# EAGLE board 1.4Fv4 (EAGLE 9.3.0)
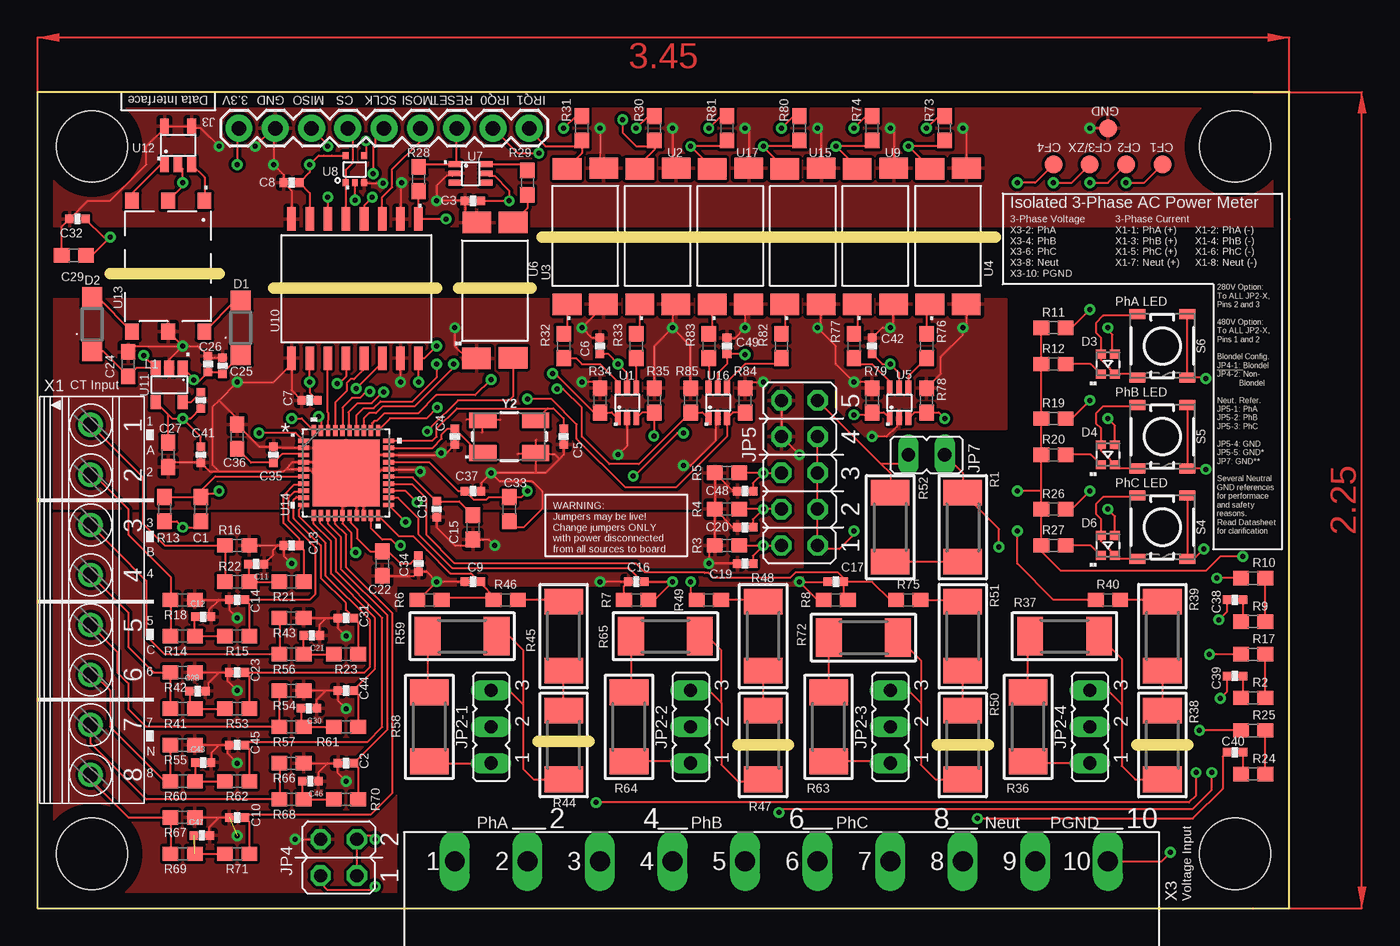
[diagram p0: board, top side]
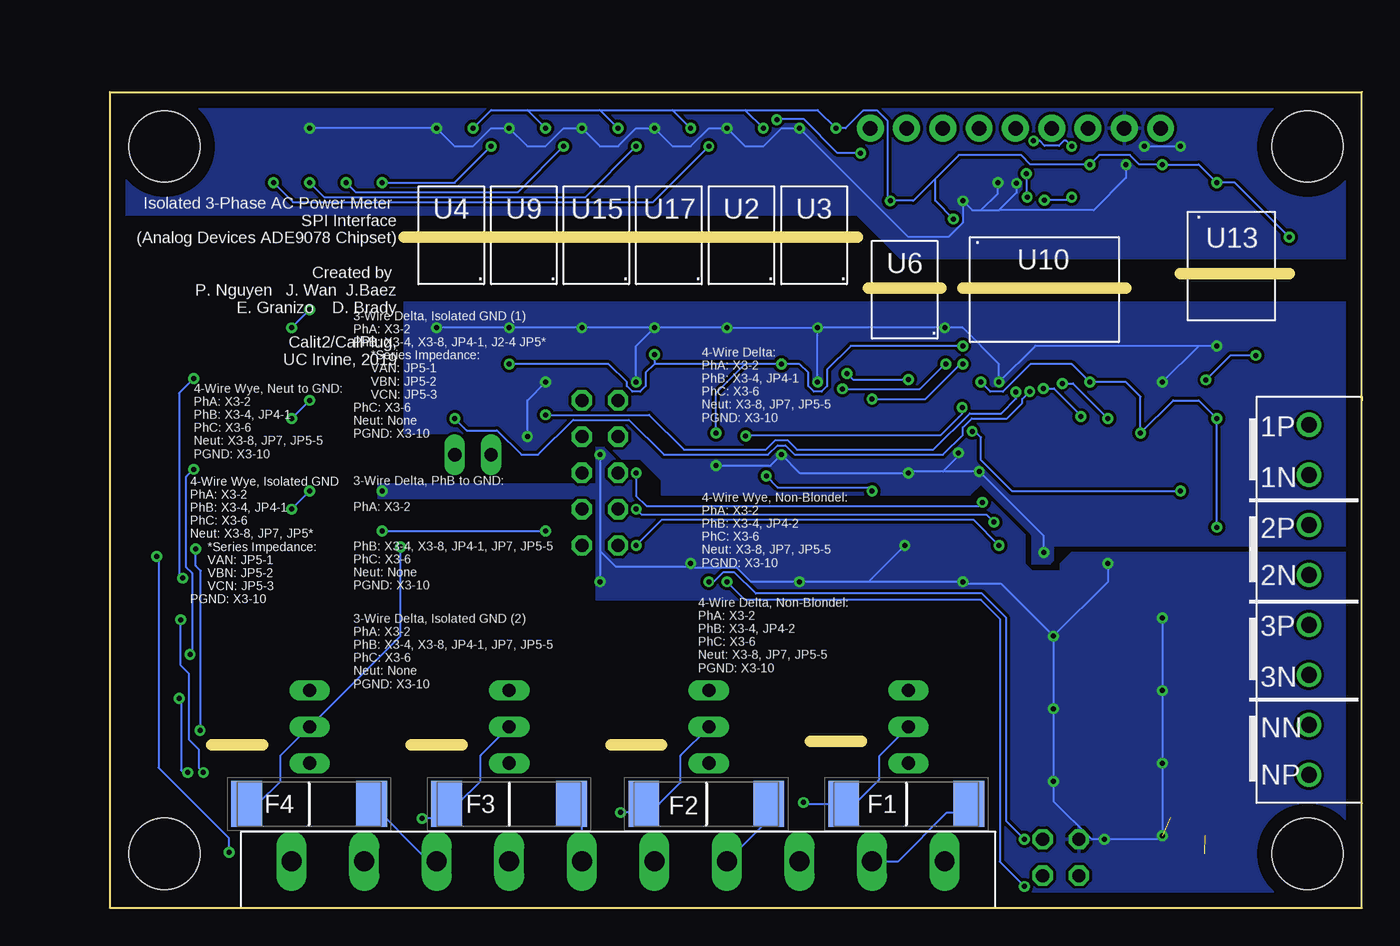
[diagram p1: board, bottom side, seen from below]

Size 87.63 x 57.15 mm. Coordinates in mm from the lower left corner, seen from the top.
Outline: 0,0 0,57.15 87.63,57.15 87.63,0 0,0
Copper layers (1*16): Top 0.035mm / dielectric 1.5mm / Bottom 0.035mm
Design rules "1.1F": minimum track width 6mil, minimum drill 0.35mm, track to track 0.205mm, track to pad 0.205mm, pad to pad 0.205mm, via to via 0.205mm, smd to smd 6mil, copper to edge 40mil, drill to drill 6mil, minimum pad ring 10mil, minimum via ring 8mil, stop-mask expansion 4mil, vias tented up to drill 0mil, thermal gap 10mil
Net classes: 0 default: clearance 0.205 mm
Holes 4.98 mm at 83.82,3.81 83.82,53.34 3.81,53.34 3.81,3.81
Milling: 8 lines

## Footprints (pad centres in the part's own frame; a part is rotated, then mirrored left to right if it is on the bottom)
0603 = smd 1.1 x 1: 1 -0.85,0; 2 0.85,0
0402-CAP = smd 0.6 x 0.6: 1 -0.55,0; 2 0.55,0
C0603 = smd 1.1 x 1: 1 -0.85,0; 2 0.85,0
SOD123 = smd 1.4 x 1.4: A 1.9,0; C -1.9,0
WL-SBCW_0606 = smd 0.6 x 0.7: 1 -0.7,0.5; 2 0.7,0.5; 3 -0.7,-0.5; 4 0.7,-0.5
FUSC10131X312N = smd 2.16 x 3.23: 1 -4.375,0; 2 4.375,0
1X09 = drill 1.016 pad 1.88: 1 0,0; 2 2.54,0; 3 5.08,0; 4 7.62,0; 5 10.16,0; 6 12.7,0; 7 15.24,0; 8 17.78,0; 9 20.32,0
JP2 = drill 0.914 long: 1 -2.54,0; 2 0,0; 3 2.54,0
JP2Q = drill 0.914 octagon: 1 -1.27,-1.27; 2 -1.27,1.27; 3 1.27,-1.27; 4 1.27,1.27
JP5Q = drill 0.914 octagon: 1 -5.08,-1.27; 2 -5.08,1.27; 3 -2.54,-1.27; 4 -2.54,1.27; 5 0,-1.27; 6 0,1.27; 7 2.54,-1.27; 8 2.54,1.27; 9 5.08,-1.27; 10 5.08,1.27
JP1 = drill 0.914 long: 1 0,-1.27; 2 0,1.27
0402-RES = smd 0.6 x 0.6: 1 -0.55,0; 2 0.55,0
R2010 = smd 1.8 x 2.7: 1 -2.413,0; 2 2.413,0
TACTILE_SWITCH_SMD_4.5MM = smd 0.7 x 1.1: 1 2.225,1.75; 2 2.225,-1.75; 3 -2.225,-1.75; 4 -2.225,1.75
B1,27 = smd 1.27 x 1.27: TP 0,0
DCKT = smd 0.9 x 0.4: 1 0,1.3; 2 0,0.65; 3 0,0; 4 2.2,0; 5 2.2,0.65; 6 2.2,1.3
PS2505 = smd 1.5 x 2: 1 0.381,3.575; 2 0.381,1.035; 3 9.906,1.016; 4 9.854,3.575
NL17SZ125 = smd 0.5 x 0.4: 1 0,1.3; 2 0,0.65; 3 0,0; 4 1.9,0; 5 1.9,1.3
16-SOIC = smd 1.65 x 0.6: 1 0,8.89; 2 0,7.62; 3 0,6.35; 4 0,5.08; 5 0,3.81; 6 0,2.54; 7 0,1.27; 8 0,0; 9 9.75,0; 10 9.75,1.27; 11 9.75,2.54; 12 9.75,3.81; 13 9.75,5.08; 14 9.75,6.35; 15 9.75,7.62; 16 9.75,8.89
TSOT25 = smd 0.7 x 1: 1 0,0; 2 0.95,0; 3 1.9,0; 4 1.9,2.4; 5 0,2.4
SOT-23-5 = smd 0.6 x 1.05: 1 0,0; 2 0.95,0; 3 1.9,0; 4 1.9,2.7; 5 0,2.7
TRANSFO_3.3 = smd 1.12 x 0.96: 1 0,5.08; 2 0,2.54; 3 0,0; 4 9.14,0; 5 9.14,2.54; 6 9.14,5.08
CP_40_7 = smd 0.762 x 0.305: 1 -2.972,2.25; 2 -2.972,1.75; 3 -2.972,1.25; 4 -2.972,0.75; 5 -2.972,0.25; 6 -2.972,-0.25; 7 -2.972,-0.75; 8 -2.972,-1.25; 9 -2.972,-1.75; 10 -2.972,-2.25; 21 2.972,-2.25; 22 2.972,-1.75; 23 2.972,-1.25; 24 2.972,-0.75; 25 2.972,-0.25; 26 2.972,0.25; 27 2.972,0.75; 28 2.972,1.25; 29 2.972,1.75; 30 2.972,2.25 | smd 0.305 x 0.762: 11 -2.25,-2.972; 12 -1.75,-2.972; 13 -1.25,-2.972; 14 -0.75,-2.972; 15 -0.25,-2.972; 16 0.25,-2.972; 17 0.75,-2.972; 18 1.25,-2.972; 19 1.75,-2.972; 20 2.25,-2.972; 31 2.25,2.972; 32 1.75,2.972; 33 1.25,2.972; 34 0.75,2.972; 35 0.25,2.972; 36 -0.25,2.972; 37 -0.75,2.972; 38 -1.25,2.972; 39 -1.75,2.972; 40 -2.25,2.972 | smd 4.699 x 4.699: 41 0,0
1751303 = drill 1.1 pad 1.7: 1 -12.25,-0.1; 2 -8.75,-0.1; 3 -5.25,-0.1; 4 -1.75,-0.1; 5 1.75,-0.1; 6 5.25,-0.1; 7 8.75,-0.1; 8 12.25,-0.1
MSTBA10 = drill 1.397 long: 1 -22.86,5.08; 2 -17.78,5.08; 3 -12.7,5.08; 4 -7.62,5.08; 5 -2.54,5.08; 6 2.54,5.08; 7 7.62,5.08; 8 12.7,5.08; 9 17.78,5.08; 10 22.86,5.08
CRYSTAL-SMD-5X3.2-4PAD = smd 1.9 x 1.1: 1 -1.85,-1.15; 2 1.85,-1.15; 3 1.85,1.15; 4 -1.85,1.15

## Placement (x,y rotation side)
C1  1uF  [0603]  11.43,27.94 90 top
C2  22n  [0402-CAP]  21.59,10.16 0 top
C3  0.1u  [0402-CAP]  30.48,49.53 180 top
C4  30p  [0402-CAP]  29.21,33.02 90 top
C5  30p  [0402-CAP]  36.83,33.02 270 top
C6  0.1u  [0402-CAP]  39.37,39.37 270 top
C7  0.1u  [0402-CAP]  19.05,35.56 0 top
C8  0.1u  [0402-CAP]  17.78,50.8 180 top
C9  22n  [0402-CAP]  30.48,22.86 180 top
C10  22n  [0402-CAP]  13.97,6.35 180 top
C11  22n  [0402-CAP]  15.3,24.1 180 top
C12  22n  [0402-CAP]  11.6,20.4 0 top
C13  22n  [0402-CAP]  17.78,25.4 0 top
C14  22n  [0402-CAP]  13.97,21.59 180 top
C15  4.7uF  [C0603]  30.48,26.67 270 top
C16  22n  [0402-CAP]  41.91,22.86 180 top
C17  22n  [0402-CAP]  55.88,22.86 180 top
C18  0.22u  [0402-CAP]  27.94,27.94 90 top
C19  22n  [0402-CAP]  49.53,24.13 180 top
C20  22n  [0402-CAP]  49.53,26.67 180 top
C21  22n  [0402-CAP]  19.2,19.1 180 top
C22  4.7uF  [C0603]  24.13,24.13 270 top
C23  22n  [0402-CAP]  13.97,16.51 180 top
C24  10uF  [C0603]  6.35,38.1 90 top
C25  1u  [0402-CAP]  12.95,37.97 270 top
C26  0.1u  [0402-CAP]  11.94,38.1 270 top
C27  10uF  [C0603]  9.14,31.75 270 top
C28  22n  [0402-CAP]  11.2,15.2 0 top
C29  10uF TANT  [C0603]  2.54,45.72 180 top
C30  22n  [0402-CAP]  19,14 180 top
C31  22n  [0402-CAP]  21.59,20.32 0 top
C32  0.1u  [0402-CAP]  2.79,48.26 0 top
C33  10uF  [C0603]  33.02,27.94 270 top
C34  0.1uF  [0402-CAP]  26.67,24.13 90 top
C35  0.22u  [0402-CAP]  16.51,31.75 270 top
C36  4.7uF  [C0603]  13.97,33.02 90 top
C37  0.1u  [0402-CAP]  30.48,29.21 180 top
C38  50n  [0402-CAP]  83.82,21.59 0 top
C39  50n  [0402-CAP]  83.82,16.26 0 top
C40  50n  [0402-CAP]  83.82,10.92 0 top
C41  0.1u  [0402-CAP]  11.43,31.75 270 top
C42  0.1u  [0402-CAP]  58.42,39.37 270 top
C43  22n  [0402-CAP]  11.6,10.2 0 top
C44  22n  [0402-CAP]  21.59,15.24 0 top
C45  22n  [0402-CAP]  13.97,11.43 180 top
C46  22n  [0402-CAP]  19.1,8.9 180 top
C47  22n  [0402-CAP]  11.5,5.1 0 top
C48  22n  [0402-CAP]  49.53,29.21 180 top
C49  0.1u  [0402-CAP]  48.26,39.37 270 top
D1  MBR0520LT  [SOD123]  14.22,40.64 90 top
D2  MBR0520LT  [SOD123]  3.81,40.89 90 top
D3  [WL-SBCW_0606]  74.93,38.1 90 top
D4  [WL-SBCW_0606]  74.93,31.75 90 top
D6  [WL-SBCW_0606]  74.93,25.4 90 top
F1  0461.500ER  [FUSC10131X312N]  31.9,7.3 0 bottom
F2  0461.500ER  [FUSC10131X312N]  45.9,7.3 0 bottom
F3  0461.500ER  [FUSC10131X312N]  59.7,7.3 0 bottom
F4  0461.500ER  [FUSC10131X312N]  73.7,7.3 0 bottom
J3  [1X09]  14.1,54.61 0 top
JP2-1  [JP2]  31.75,12.7 90 top
JP2-2  [JP2]  45.72,12.7 90 top
JP2-3  [JP2]  59.69,12.7 90 top
JP2-4  [JP2]  73.66,12.7 90 top
JP4  [JP2Q]  21.08,3.56 90 top
JP5  [JP5Q]  53.34,30.48 90 top
JP7  [JP1]  62.23,31.75 90 top
L1  15nH  [0402-RES]  11.43,35.56 270 top
R1  300k  [R2010]  64.77,26.67 270 top
R2  5k  [0603]  85.09,14.73 0 top
R3  1k  [0603]  48.26,25.4 0 top
R4  1k  [0603]  48.26,27.94 0 top
R5  1k  [0603]  48.26,30.48 0 top
R6  1k  [0603]  27.43,21.59 0 top
R7  1k  [0603]  41.91,21.59 0 top
R8  1k  [0603]  55.88,21.59 0 top
R9  5k  [0603]  85.09,20.07 0 top
R10  5k  [0603]  85.09,23.11 180 top
R11  2k  [0603]  71.12,40.64 0 top
R12  2k  [0603]  71.12,38.1 180 top
R13  4.7k  [0603]  8.89,27.94 270 top
R14  0  [0603]  10.16,19.05 0 top
R15  1k  [0603]  13.97,19.05 0 top
R16  20  [0603]  13.97,25.4 180 top
R17  5k  [0603]  85.09,17.78 180 top
R18  20  [0603]  10.16,21.59 0 top
R19  2k  [0603]  71.12,34.29 0 top
R20  2k  [0603]  71.12,31.75 180 top
R21  1k  [0603]  17.78,22.86 0 top
R22  0  [0603]  13.97,22.86 0 top
R23  1k  [0603]  21.59,17.78 0 top
R24  5k  [0603]  85.09,9.4 0 top
R25  5k  [0603]  85.09,12.45 180 top
R26  2k  [0603]  71.12,27.94 0 top
R27  2k  [0603]  71.12,25.4 0 top
R28  4.7k  [0603]  26.67,51.05 90 top
R29  560  [0603]  34.29,50.8 270 top
R30  4.7k  [0603]  43.18,54.61 90 top
R31  4.7k  [0603]  38.1,54.61 90 top
R32  560  [0603]  36.83,39.37 270 top
R33  560  [0603]  41.91,39.37 270 top
R34  10k  [0603]  39.37,35.56 270 top
R35  10k  [0603]  43.18,35.56 90 top
R36  245k  [R2010]  69.34,12.7 90 top
R37  245k  [R2010]  71.89,19.05 0 top
R38  120k  [R2010]  78.74,11.43 90 top
R39  120k  [R2010]  78.74,19.05 90 top
R40  120k  [0603]  74.93,21.59 180 top
R41  0  [0603]  10.16,13.97 0 top
R42  20  [0603]  10.16,16.51 0 top
R43  20  [0603]  17.78,20.32 180 top
R44  120k  [R2010]  36.83,11.43 90 top
R45  120k  [R2010]  36.83,19.05 90 top
R46  120k  [0603]  32.77,21.59 180 top
R47  120k  [R2010]  50.8,11.43 90 top
R48  120k  [R2010]  50.8,19.05 90 top
R49  120k  [0603]  46.99,21.59 180 top
R50  120k  [R2010]  64.77,11.43 90 top
R51  120k  [R2010]  64.77,19.05 90 top
R52  300k  [R2010]  59.69,26.67 90 top
R53  1k  [0603]  13.97,13.97 0 top
R54  20  [0603]  17.78,15.24 180 top
R55  20  [0603]  10.16,11.43 180 top
R56  0  [0603]  17.78,17.78 0 top
R57  0  [0603]  17.78,12.7 0 top
R58  245k  [R2010]  27.43,12.7 90 top
R59  245k  [R2010]  29.72,19.05 0 top
R60  0  [0603]  10.16,8.89 0 top
R61  1k  [0603]  21.59,12.7 0 top
R62  1k  [0603]  13.97,8.89 0 top
R63  245k  [R2010]  55.37,12.7 90 top
R64  245k  [R2010]  41.4,12.7 90 top
R65  245k  [R2010]  43.95,19.05 0 top
R66  20  [0603]  17.78,10.16 180 top
R67  20  [0603]  10.16,6.35 0 top
R68  0  [0603]  17.78,7.62 0 top
R69  0  [0603]  10.16,3.81 0 top
R70  1k  [0603]  21.59,7.62 0 top
R71  1k  [0603]  13.97,3.81 0 top
R72  245k  [R2010]  57.82,18.95 0 top
R73  4.7k  [0603]  63.5,54.61 90 top
R74  4.7k  [0603]  58.42,54.61 90 top
R75  120k  [0603]  60.96,21.59 180 top
R76  560  [0603]  62.23,39.37 270 top
R77  560  [0603]  57.15,39.37 270 top
R78  10k  [0603]  62.23,35.56 90 top
R79  10k  [0603]  58.42,35.56 270 top
R80  4.7k  [0603]  53.34,54.61 90 top
R81  4.7k  [0603]  48.26,54.61 270 top
R82  560  [0603]  52.07,39.37 270 top
R83  560  [0603]  46.99,39.37 270 top
R84  10k  [0603]  49.53,35.56 90 top
R85  10k  [0603]  45.72,35.56 270 top
S4  MOMENTARY-SWITCH-SPST-SMD-4.5MM  [TACTILE_SWITCH_SMD_4.5MM]  78.74,26.67 270 top
S5  MOMENTARY-SWITCH-SPST-SMD-4.5MM  [TACTILE_SWITCH_SMD_4.5MM]  78.74,33.02 270 top
S6  MOMENTARY-SWITCH-SPST-SMD-4.5MM  [TACTILE_SWITCH_SMD_4.5MM]  78.74,39.37 270 top
TP1  PTR1B1,27  [B1,27]  71.12,52.07 180 top
TP2  PTR1B1,27  [B1,27]  73.66,52.07 0 top
TP3  PTR1B1,27  [B1,27]  76.2,52.07 180 top
TP4  PTR1B1,27  [B1,27]  78.74,52.07 180 top
TP5  PTR1B1,27  [B1,27]  74.93,54.61 180 top
U1  SN74LVC  [DCKT]  41.91,34.29 90 top
U2  PS2505  [PS2505]  45.72,41.91 90 top
U3  PS2505  [PS2505]  40.64,41.91 90 top
U4  PS2505  [PS2505]  66.04,41.91 90 top
U5  SN74LVC  [DCKT]  60.96,34.29 90 top
U6  PS2505  [PS2505]  29.71,48.4 270 top
U7  SN74LVC  [DCKT]  29.21,50.8 0 top
U8  NL17SZ125  [NL17SZ125]  22.86,50.8 90 top
U9  PS2505  [PS2505]  60.96,41.91 90 top
U10  ISO7241  [16-SOIC]  17.78,48.26 270 top
U11  PAM2305  [TSOT25]  10.16,37.85 180 top
U12  SN6501  [SOT-23-5]  8.89,52.07 0 top
U13  TRANSFO_3.3  [TRANSFO_3.3]  6.6,49.53 270 top
U14  ADE9078  [CP_40_7]  21.59,30.48 0 top
U15  PS2505  [PS2505]  55.88,41.91 90 top
U16  SN74LVC  [DCKT]  48.26,34.29 90 top
U17  PS2505  [PS2505]  50.8,41.91 90 top
X1  1751303  [1751303]  3.81,21.59 270 top
X3  MSTBA10  [MSTBA10]  52.07,-1.78 0 top
Y2  12.288MHz  [CRYSTAL-SMD-5X3.2-4PAD]  33.02,33.02 0 top

## Library data of the parts
C1 = SparkFun-Capacitors; MPN: MC0805B104K500A5.08MM; OC_NEWARK: 46P6240; PROD_ID: CAP-00867
C2 C9-C14 C16 C17 C19-C21 C23 C28 C30 C31 C38-C40 C43-C48 = Nizanlib; MF: KEMET; MPN: C0603C223K5RACTU; OC_NEWARK: 03C3260
C3 C6-C8 C25 C26 C32 C34 C37 C41 C42 C49 = Nizanlib; MPN: C0603X5R1A104K030BC; OC_NEWARK: 04X3188
C4 C5 = Nizanlib; MPN: MC0402N180J500CT; OC_NEWARK: 06R4796
C15 C22 C24 C27 C33 C36 = resistor; MPN: C1608X5R1A106K080AC; OC_NEWARK: 04X3243
C18 C35 = Nizanlib; MPN: MC0805F224Z500CT; OC_NEWARK: 06R3958
C29 = resistor; MF: VISHAY/SPRAGUE; MPN: 195D106X96R3V2T; OC_NEWARK: 08J0446
D1 D2 = diode; MPN: MBR0520LT1G.; OC_NEWARK: 26AC1776
D3 D4 D6 = Wurth_Elektronik_Optoelectronics_rev18a
F1-F4 = SamacSys_Parts; DESCRIPTION: Littelfuse 0.5A Non-Resettable Surface Mount Fuse, 600 V; HEIGHT: 3.12mm; MANUFACTURER_NAME: LITTELFUSE; MANUFACTURER_PART_NUMBER: 0461.500ER; MOUSER_PART_NUMBER: 576-0461.500ER
J3 = SparkFun-Connectors; MF: TYCO ELECTRONICS; MPN: 350547-1; OC_NEWARK: 01C1197
JP2-1-JP2-4 JP7 = jumper
JP4 JP5 = jumper; MF: TYCO ELECTRONICS; MPN: 350547-1; OC_NEWARK: 01C1197
L1 = Nizanlib; OC_NEWARK: unknown
R1 R36-R39 R44 R45 R47 R48 R50-R52 R58 R59 R63-R65 R72 = rc-master-smd
R2-R35 R40-R43 R46 R49 R53-R57 R60-R62 R66-R71 R73-R85 = SparkFun-Resistors
S4-S6 = SparkFun-Switches; PROD_ID: SWCH-09213
TP1-TP5 = testpad
U1 U5 U16 = Damien_divers; MF: TEXAS INSTRUMENTS; MPN: SN74LVC1G34DBVR; OC_NEWARK: 01J0787
U2-U4 U6 U9 U15 U17 = wattmeter; MPN: PS2505-4-A; OC_NEWARK: 09X6256
U7 = Damien_divers; MF: TEXAS INSTRUMENTS; MPN: SN74LVC1G34DBVR; OC_NEWARK: 01J0787; SPICEPREFIX: X
U8 = wattmeter; MPN: SN74LVC1G125DRLR; OC_NEWARK: 01X3093
U10 = wattmeter; MPN: ISO7241CQDWRQ1; OC_NEWARK: 58Y3495
U11 = Damien_regulator; OC_NEWARK: unknown
U12 = CalPlug; MPN: SN6501DBVT; OC_NEWARK: 05W5796
U13 = Damien_power; OC_NEWARK: unknown
U14 = 9078v1; MPN: ADE9078ACPZ; OC_NEWARK: 15AC8059
X1 = con-phoenix-350; OC_FARNELL: unknown; OC_NEWARK: unknown
X3 = con-phoenix-508; MF: FARNELL; MPN: 1757323; OC_FARNELL: 3705249; OC_NEWARK: 71C4168
Y2 = SparkFun-Clocks; PROD_ID: XTAL-09653; SPICEPREFIX: B

## Nets
AGND: C2.1 C9.2 C10.2 C11.1 C12.2 C13.1 C14.2 C15.2 C16.2 C17.2 C18.1 C19.2 C20.2 C21.1 C22.2 C23.2 C28.2 C30.1 C31.1 C34.1 C43.2 C44.1 C45.2 C46.1 C47.2 C48.2 JP4.4 JP5.8 JP5.10 R3.1 R4.1 R5.1 R6.1 R7.1 R8.1 R16.1 R18.2 R42.2 R43.1 R54.1 R55.1 R66.1 R67.2
AVDDOUT: C15.1 C18.2 U14.25
CF1_ISO: R85.2 U14.33 U16.1
CF1_OUT: R81.2 TP4.TP U17.4
CF2_ISO: R84.1 U14.34 U16.3
CF2_OUT: R80.1 TP3.TP U15.4
CF3/ZX_ISO: R79.2 U5.1 U14.35
CF3/ZX_OUT: R74.1 TP2.TP U9.4
CF4_ISO: R78.1 U5.3 U14.36
CF4_OUT: R73.1 TP1.TP U4.4
CS: J3.4 U8.1 U10.5
CS_ISO: U10.12 U14.40
DVDDOUT: C35.2 C36.1 U14.3
GND: C3.2 C8.2 C29.2 C32.1 J3.2 TP5.TP U2.3 U3.3 U4.3 U6.2 U7.2 U8.3 U9.3 U10.2 U10.8 U12.4 U12.5 U15.3 U17.3
GNDI: C4.1 C5.2 C6.1 C7.1 C24.2 C25.1 C26.1 C27.2 C33.2 C35.1 C36.2 C37.1 C41.2 C42.1 C49.1 R34.1 R35.2 R78.2 R79.1 R84.2 R85.1 U1.2 U2.2 U3.2 U4.2 U5.2 U6.3 U9.2 U10.9 U10.15 U11.2 U13.5 U14.2 U14.4 U14.5 U14.15 U14.17 U14.18 U14.26 U14.28 U14.41 U15.2 U16.2 U17.2
I1N: R14.1 R18.1 X1.2
I1P: R16.2 R22.1 X1.1
I2N: R41.1 R42.1 X1.4
I2P: R43.2 R56.1 X1.3
I3N: R55.2 R60.1 X1.6
I3P: R54.2 R57.1 X1.5
I_NEUT_N: R67.1 R69.1 X1.8
I_NEUT_P: R66.2 R68.1 X1.7
IAN: C14.1 R15.2 U14.8
IAP\: C13.2 R21.2 U14.7
IBN: C23.1 R53.2 U14.10
IBP: C31.2 R23.2 U14.9
ICN: C45.1 R62.2 U14.12
ICP: C44.2 R61.2 U14.11
INN: C10.1 R71.2 U14.14
INP: C2.2 R70.2 U14.13
IRQ0_ISO: R35.1 U1.3 U14.31
IRQ0_OUT: J3.8 R30.1 U2.4
IRQ1_ISO: R34.2 U1.1 U14.32
IRQ1_OUT: J3.9 R31.1 U3.4
MISO: U8.2 U10.6
MISO_ISO: U10.11 U14.38
MISO_OUT: J3.3 U8.4
MOSI: J3.6 U10.3
MOSI_ISO: U10.14 U14.39
N$1: C5.1 U14.30 Y2.3
N$2: C11.2 R21.1 R22.2
N$3: C12.1 R14.2 R15.1
N$4: L1.1 U11.5
N$7: C30.2 R57.2 R61.1
N$8: C43.1 R60.2 R62.1
N$10: C38.2 R9.1
N$11: R32.2 U1.6
N$12: R32.1 U3.1
N$13: C4.2 U14.29 Y2.1
N$16: R25.2 S4.1 S4.4
N$18: D1.A U13.6
N$19: C24.1 C25.2 C26.2 D1.C D2.C U11.1 U11.3
N$20: D2.A U13.4
N$21: U12.3 U13.1
N$23: U12.1 U13.3
N$24: C21.2 R23.1 R56.2
N$25: R29.2 U6.1
N$26: R29.1 U7.6
N$27: C28.1 R41.2 R53.1
N$28: R9.2 R10.1
N$30: R33.2 U1.4
N$31: R76.2 U5.4
N$33: R1.2 R52.1
N$34: R64.2 R65.1
N$39: R33.1 U2.1
N$40: JP2-1.1 R58.1
N$41: R58.2 R59.1
N$42: R10.2 S6.1 S6.4
N$43: JP2-1.3 R44.1 R59.2
N$44: JP2-2.1 R64.1
N$46: JP2-2.3 R47.1 R65.2
N$47: R63.2 R72.1
N$48: C46.2 R68.2 R70.1
N$50: JP2-4.3 R37.2 R38.1
N$52: JP2-4.1 R36.1
N$53: R36.2 R37.1
N$54: JP5.9 JP7.2 R52.2
N$56: C47.1 R69.2 R71.1
N$58: C39.2 R2.1
N$59: R2.2 R17.1
N$60: R17.2 S5.1 S5.4
N$61: D3.1 R12.1
N$62: D6.2 D6.3 S4.2 S4.3
N$63: C40.2 R24.1
N$64: R24.2 R25.1
N$65: D3.4 R11.2
N$66: D4.2 D4.3 S5.2 S5.3
N$67: R76.1 U4.1
N$68: R77.1 U9.1
N$69: R77.2 U5.6
N$71: JP5.1 JP5.3 JP5.5 JP5.7 R40.2
N$72: R82.1 U15.1
N$73: R83.1 U17.1
N$74: R83.2 U16.6
N$76: D3.2 D3.3 S6.2 S6.3
N$78: D4.4 R19.2
N$79: R45.2 R46.1
N$81: C40.1 F3.1 JP2-3.2
N$82: F4.1 JP2-4.2 JP7.1 R1.1
N$83: C38.1 F1.1 JP2-1.2
N$84: R48.2 R49.1
N$85: JP2-3.3 R50.1 R72.2
N$86: JP4.1 JP4.3 R49.2
N$87: C39.1 F2.1 JP2-2.2
N$90: JP2-3.1 R63.1
N$96: R50.2 R51.1
N$97: R51.2 R75.1
N$99: R82.2 U16.4
N$102: R44.2 R45.1
N$107: R47.2 R48.1
N$112: R38.2 R39.1
N$113: R39.2 R40.1
N$118: D4.1 R20.1
N$121: D6.1 R27.2
N$122: D6.4 R26.2
NEUT: F4.2 X3.8
PGROUND: R11.1 R12.2 R19.1 R20.2 R26.1 R27.1 X3.10
REF: C22.1 C34.2 U14.16
RESET: J3.7 R28.2 U7.1
RESET_ISO: C1.2 R13.1 U6.4 U14.6
SCLK: J3.5 U10.4
SCLK_ISO: U10.13 U14.37
V_PH_A: F1.2 X3.2
V_PH_B: F2.2 X3.4
V_PH_C: F3.2 X3.6
VAN: C19.1 JP5.2 R3.2 U14.19
VAP: C9.1 R6.2 R46.2 U14.20
VBN: C20.1 JP5.4 R4.2 U14.21
VBP: C16.1 JP4.2 R7.2 U14.22
VCC: C1.1 C6.2 C7.2 C27.1 C33.1 C37.2 C41.1 C42.2 C49.2 L1.2 R13.2 U1.5 U5.5 U10.10 U10.16 U11.4 U14.1 U14.27 U16.5
VCN: C48.1 JP5.6 R5.2 U14.23
VCP: C17.1 R8.2 R75.2 U14.24
VDD: C3.1 C8.1 C29.1 C32.2 J3.1 R28.1 R30.2 R31.2 R73.2 R74.2 R80.2 R81.1 U7.5 U8.5 U10.1 U10.7 U12.2 U13.2

## Tracks (layer width: path | path; a pad name or v marks a point on that pad's centre or on a via)
AGND  (via drill 0.35)  (1 unrouted)
  Top 0.152: R7.1 41.06,22.56 C16.2 v39.37,22.86 | JP5.10 JP5.8 v53.34,31.75 | R67.2 12.7,6.35 | 12.7,6.35 C10.2 | 12.7,6.35 11.98,5.63 11.98,5.17 C47.2 | R55.1 12.73,11.43 | 13.3,11.43 12.8,11.43 12.73,11.43 | 13.3,11.43 C45.2 | R66.1 20.32,10.16 | 20.32,10.16 21,10.16 | 21,10.16 C2.1 | R54.1 20.2,15.24 | 20.2,15.24 C44.1 21.04,14.52 v21.59,13.97 | R42.2 12.7,16.51 | 12.7,16.51 13.3,16.51 | 13.3,16.51 C23.2 | 12.7,16.51 11.98,15.79 11.98,15.43 C28.2 | R43.1 20.2,20.32 | 20.2,20.32 20.9,20.32 | 20.9,20.32 C31.1 21.04,19.6 v21.59,19.05 | R18.2 12.7,21.59 | 12.7,21.59 C14.2 13.42,20.87 v13.97,20.32 | 12.7,21.59 11.98,20.87 11.98,20.57 C12.2 | R16.1 16.8,25.4 | 16.8,25.4 C13.1 17.23,24.68 v17.78,24.13 | C9.2 v27.94,22.86 | R6.1 26.67,21.59 v27.94,22.86 | R8.1 54.61,21.59 v53.34,22.86 C17.2 | C19.2 v46.99,24.13 46.99,24.98 R3.1 R4.1 | C20.2 48.68,26.67 R4.1 | R4.1 R5.1 48.68,29.21 C48.2 | C22.2 26.37,23.28 C34.1 27.22,23.58 v27.94,22.86 | v32,25.4 31.58,25.82 C15.2 30.06,25.4 29.21,25.4 27.94,26.67 C18.1 | v18.03,4.83 JP4.4 | 16.1,24.35 C11.1 16.5,24.75 16.5,25.1 16.8,25.4 | 20.9,20.25 20.9,20.32 | C21.1 19.75,19.87 20.2,20.32 | v21.59,8.89 21,9.48 21,10.16 | v13.97,15.24 13.3,15.91 13.3,16.51 | 20.32,10.16 19.65,9.49 C46.1 | v13.97,10.16 13.3,10.83 13.3,11.43 | C30.1 19.55,14.59 20.2,15.24 | C43.2 12.2,10.25 12.2,10.9 12.73,11.43
  Bottom 0.152: 34.54,22.86 v27.94,22.86 27.82,22.74 25.28,22.74 v21.59,19.05 | 34.54,22.86 v39.37,22.86 42.76,22.86 43.78,23.88 46.74,23.88 v46.99,24.13 47.18,23.94 52.26,23.94 53.34,25.01 | v13.97,20.32 v13.97,15.24 v13.97,10.16 v13.97,5.08 14.22,4.83 v18.03,4.83 18.92,4.83 21.59,7.5 v21.59,8.89 v21.59,13.97 v21.59,19.05 | v17.78,24.13 17.78,22.86 v21.59,19.05 | v53.34,31.75 53.34,25.01 | v32,25.4 34.54,22.86 | 53.34,25.01 v53.34,22.86
  pour Bottom: 53.59,21.59 53.59,32.26 53.09,32.26 49.28,28.45 27.43,28.45 26.67,29.21 23.62,26.16 23.62,24.13 23.11,23.62 21.08,23.62 21.08,24.13 20.32,24.89 0,24.89 0,0 25.4,0 25.4,20.32 26.67,21.59
  pour Top (rank 2): 0,0 25.15,0 25.15,22.61 53.59,22.61 53.59,37.08 0.25,37.08 0,36.83
AVDDOUT
  Top 0.152: C15.1 29.51,28.49 C18.2 26.27,30.16 24.63,30.16 U14.25
CF1_ISO  (via drill 0.35)
  Top 0.152: U16.1 46.54,34.71 R85.2 42.1,31.09 40.03,31.09 38.1,33.02 38.1,35.05 36.79,36.36 v36.36,36.36 | v29.13,38.1 29.13,37.85 26.41,35.13 24.16,35.13 23.69,34.66 23.23,34.66 22.84,34.27 U14.33
  Bottom 0.152: v36.36,36.36 30.95,36.36 29.21,38.1 v29.13,38.1
CF1_OUT  (via drill 0.35)
  Top 0.152: U17.4 47.23,51.84 v45.72,53.34 47.84,53.34 R81.2 | TP4.TP 77.47,50.8 v76.2,50.8
  Bottom 0.152: v76.2,50.8 74.83,49.43 49.63,49.43 v45.72,53.34
CF2_ISO  (via drill 0.35)
  Top 0.152: R84.1 48.68,34.71 U16.3 48.26,33.02 44.7,29.46 41.15,29.46 37.74,32.87 37.74,33.88 35.97,35.66 v34.29,35.66 | v27.94,38.1 27.94,37.17 26.26,35.48 24.01,35.48 23.54,35.01 22.81,35.01 22.34,34.54 U14.34
  Bottom 0.152: v34.29,35.66 30.55,35.66 28.11,38.1 v27.94,38.1
CF2_OUT  (via drill 0.35)
  Top 0.152: TP3.TP 74.93,50.8 v73.66,50.8 | R80.1 52.92,53.34 v50.8,53.34 50.8,53.27 U15.4
  Bottom 0.152: v73.66,50.8 72.64,49.78 54.36,49.78 v50.8,53.34
CF3/ZX_ISO  (via drill 0.35)
  Top 0.152: U5.1 59.24,34.71 R79.2 58.25,34.54 v57.15,34.54 | v24.22,36.14 24.16,36.14 23.39,35.37 22.41,35.37 21.77,34.73 21.77,33.52 U14.35
  Bottom 0.152: v57.15,34.54 49.91,34.54 47.47,32.11 41.72,32.11 41.06,32.77 40.22,32.77 39.56,32.11 30,32.11 27.46,34.65 25.25,34.65 24.22,35.67 v24.22,36.14
CF3/ZX_OUT  (via drill 0.35)
  Top 0.152: U9.4 57.38,51.84 v55.88,53.34 58,53.34 R74.1 | TP2.TP 72.39,50.8 v71.12,50.8
  Bottom 0.152: v71.12,50.8 70.46,50.14 59.08,50.14 v55.88,53.34
CF4_ISO  (via drill 0.35)
  Top 0.152: U5.3 61.38,34.71 R78.1 63.08,34.71 v63.5,34.29 | U14.36 21.34,35.06 22.01,35.73 22.57,35.73 23.01,36.17 v23.26,36.17
  Bottom 0.152: v63.5,34.29 62.66,33.45 60.55,33.45 58.84,31.75 57.66,31.75 55.22,34.19 51.31,34.19 48.87,31.75 48.77,31.75 41.57,31.75 40.91,32.41 40.37,32.41 39.71,31.75 29.32,31.75 27.94,33.13 27.94,33.66 27.31,34.29 24.85,34.29 23.77,35.36 23.77,35.66 v23.26,36.17
CF4_OUT  (via drill 0.35)
  Top 0.152: U4.4 62.47,51.84 v60.96,53.34 63.08,53.34 R73.1 | TP1.TP 69.85,50.8 v68.58,50.8
  Bottom 0.152: v68.58,50.8 63.5,50.8 v60.96,53.34
CS
  Top 0.152: J3.4 22.04,54.29 22.04,52.17 21.56,51.69 U8.1 21.56,48.29 U10.5
CS_ISO  (via drill 0.35)
  Top 0.152: v17.78,34.29 18.5,34.29 U14.40 | v20.98,36.74 21.09,36.74 21.59,37.24 U10.12
  Bottom 0.152: v20.98,36.74 20.23,36.74 v17.78,34.29
DVDDOUT
  Top 0.152: U14.3 18.55,31.8 17.11,31.8 C35.2 14.94,31.2 C36.1
GND  (via drill 0.35)
  Top 0.152: U15.3 54.86,54.36 v54.61,54.61 | TP5.TP v73.66,54.61 | C29.2 1.69,47.71 C32.1 3.51,49.53 5.08,49.53 7.62,52.07 7.62,53.34 8.89,54.61 U12.5 U12.4 10.95,54.61 11.43,54.61 v12.7,53.34 | v49.53,54.61 49.78,54.36 U17.3 | U10.8 17.78,50.25 C8.2 17.23,51.35 v16.51,52.07 16.51,54.48 J3.2 16.51,54.61 v15.24,53.34 | v64.77,54.61 65.02,54.36 U4.3 | v59.69,54.61 59.94,54.36 U9.3 | v44.45,54.61 44.45,52.07 U2.3 | v39.37,54.61 39.37,52.07 U3.3 | U8.3 22.91,50.76 v24.18,50.76 | v25.49,50.8 25.4,50.71 U10.2 | U7.2 29.04,51.28 28.64,51.28 27.94,50.58 v27.94,49.53 C3.2 29.93,48.81 30.72,48.02 U6.2
  Bottom 0.152: v16.51,52.07 16.51,51.14 18.78,48.87 25.4,48.87 | 26.67,48.87 27.28,48.87 v27.94,49.53 27.94,47.99 28.94,46.99 31.75,46.99 v39.37,54.61 40.64,54.61 41.91,53.34 43.18,53.34 v44.45,54.61 45.72,54.61 46.99,53.34 48.26,53.34 v49.53,54.61 50.8,54.61 52.07,53.34 53.34,53.34 v54.61,54.61 55.88,54.61 57.15,53.34 58.42,53.34 v59.69,54.61 60.96,54.61 62.23,53.34 63.5,53.34 v64.77,54.61 v73.66,54.61 | 26.67,48.87 25.4,48.87 | v15.24,53.34 v12.7,53.34 | v24.18,50.76 24.18,50.1 25.4,48.87 | 26.67,48.87 25.49,50.05 v25.49,50.8
  pour Bottom: 0,57.15 0,45.47 32.26,45.47 35.31,48.51 87.63,48.51 87.63,57.15
  pour Top: 0,57.15 0,47.75 87.63,47.75 87.63,57.15
GNDI  (via drill 0.35)
  Top 0.152: C25.1 12.06,38.52 C26.1 11.22,39.37 v10.16,39.37 | v10.16,39.37 U13.5 | C24.2 6.77,39.37 v10.16,39.37 | U11.2 9.21,38.42 v10.16,39.37 | U14.2 16.58,32.23 C35.1 15.54,32.3 C36.2 13.97,34.29 12.7,35.56 | 17.37,30.73 U14.5 18.68,30.66 19.12,30.66 19.3,30.48 U14.41 | v31.75,30.48 31.03,29.76 C37.1 | C4.1 28.63,31.89 v28.25,31.89 28.09,31.73 U14.28 22.84,31.73 U14.41 | U14.41 23.88,30.48 24.06,30.66 24.5,30.66 U14.26 26.63,30.73 v26.79,30.57 | U14.41 20.84,31.23 U14.4 17.87,31.23 17.37,30.73 | U14.41 21.34,30.23 U14.15 21.34,26.93 21.96,26.3 21.96,25.21 v22.27,24.91 | 12.7,35.56 v13.97,36.83 16.51,36.83 17.78,38.1 U10.9 17.78,36.28 C7.1 | 12.7,35.56 12.27,35.12 12.27,31.02 12.7,30.59 | 17.37,30.73 17.22,30.59 12.7,30.59 | 12.7,30.59 12.04,30.59 C41.2 9.44,31.2 C27.2 | U4.2 65,40.88 v64.77,40.64 64.77,40.13 63.25,38.61 63.25,37.43 R78.2 | U14.17 22.34,29.21 | 22.34,29.21 22.34,29.73 U14.41 | U14.18 22.84,28.71 22.34,29.21 | U17.2 49.53,42.06 v49.53,40.64 48.81,39.92 C49.1 | R84.2 49.95,36.83 v50.8,36.83 | R85.1 45.72,39.37 v44.45,40.64 | C5.2 36.83,31.75 36.54,31.46 | 36.54,31.46 35.56,30.48 34.9,30.48 | 34.9,30.48 v31.75,30.48 | C6.1 38.82,39.92 v38.1,40.64 39.6,42.15 U3.2 | R35.2 43.18,39.37 v44.45,40.64 | R34.1 38.95,36.83 v38.1,36.83 | U1.2 41.26,32.37 v40.64,31.75 | C42.1 59.14,40.64 v59.69,40.64 59.92,40.88 U9.2 | v25.4,36.83 U10.15 | U2.2 44.45,42.06 v44.45,40.64 | C33.2 33.44,26.67 34.04,26.67 35.31,27.94 35.31,29.21 34.64,29.88 32.35,29.88 v31.75,30.48 | U16.2 47.44,34.12 47.44,32.71 45.72,30.99 v45.21,30.99 | U5.2 60.14,34.12 60.14,33.72 59.44,33.02 v58.42,33.02 | U15.2 54.84,40.88 v54.61,40.64 55.88,39.37 55.88,38.1 v57.15,36.83 58,36.83 R79.1
  Top 0.152: 34.9,30.48 34.9,31.8 | 31.1,34.2 31.1,33.3 | 31.1,34.2 30,34.2 | 31.1,34.2 32.4,34.2 | 34.9,31.8 33.6,31.8 | 34.9,31.8 36.2,31.8 36.54,31.46 | 34.9,31.8 34.9,32.8 | v29.21,40.64 29.21,39.37 30.1,38.48
  Bottom 0.152: v13.97,36.83 11.43,39.37 v10.16,39.37 22.86,39.37 v25.4,36.83 25.4,38.1 27.94,40.64 v29.21,40.64 v38.1,40.64 | v38.1,40.64 v44.45,40.64 v49.53,40.64 | v49.53,40.64 v54.61,40.64 v59.69,40.64 v64.77,40.64 | 29.33,30.57 28.25,31.66 v28.25,31.89 | 29.33,30.57 31.66,30.57 v31.75,30.48 39.37,30.48 v40.64,31.75 41.4,30.99 v45.21,30.99 | v22.27,24.91 22.27,26.07 26.77,30.57 v26.79,30.57 29.33,30.57 | v50.8,36.83 50.8,39.37 v49.53,40.64 | v38.1,36.83 v38.1,40.64 | v58.42,33.02 58.42,35.56 v57.15,36.83
  pour Bottom: 0,42.42 67.06,42.42 67.06,33.27 60.71,33.27 58.93,31.5 56.39,31.5 56.39,32 54.36,32 53.59,32.77 53.09,32.77 51.82,31.5 50.55,31.5 49.02,29.97 49.02,28.96 27.43,28.96 26.67,29.72 23.11,26.16 23.11,24.13 21.84,24.13 21.59,24.38 21.59,25.4 0,25.4
  pour Top: 0,42.67 67.82,42.67 67.82,33.53 60.2,33.53 59.69,33.02 57.91,33.02 55.88,35.05 55.88,37.08 51.31,37.08 50.8,36.32 50.8,31.24 46.23,31.24 46.23,27.94 0,27.94
I1N
  Top 0.152: R14.1 R18.1 9.31,23.2 6.35,26.16 6.35,27.94 3.95,30.34 X1.2
I1P
  Top 0.152: R22.1 R16.2 8.89,25.4 7.37,26.92 7.37,30.18 X1.1
I2N
  Top 0.152: R41.1 R42.1 8.12,16.51 6.35,18.29 6.35,20.7 X1.4
I2P
  Top 0.152: R43.2 R56.1 8.89,17.78 7.62,19.05 7.62,22.93 5.44,25.11 5.12,25.43 X1.3
I3N
  Top 0.152: R55.2 R60.1 8.89,8.89 5.08,12.7 5.08,15.24 3.98,16.34 X1.6
I3P
  Top 0.152: R54.2 R57.1 7.62,12.7 6.35,13.97 6.35,15.75 5.59,16.51 5.59,17.96 X1.5
I_NEUT_N
  Top 0.152: R69.1 R67.1 6.35,6.35 3.81,8.89 3.81,9.24 X1.8
I_NEUT_P
  Top 0.152: R66.2 R68.1 7.62,7.62 3.71,11.53 X1.7
IAN
  Top 0.152: R15.2 14.82,21.29 C14.1 19.05,21.59 19.46,22 19.46,25.27 17.57,27.15 17.57,28.75 17.98,29.16 18.55,29.16 U14.8
IAP\
  Top 0.152: R21.2 18.63,25.1 C13.2 18.33,25.84 17.22,26.96 17.22,28.9 17.98,29.66 18.55,29.66 U14.7
IBN
  Top 0.152: R53.2 14.82,16.21 C23.1 14.54,16.49 22.85,16.49 23.27,16.91 23.27,20.19 20.18,23.28 20.18,25.56 18.3,27.44 18.3,27.91 U14.10
IBP
  Top 0.152: R23.2 22.44,20.02 C31.2 21.59,20.87 21.59,21.36 19.82,23.13 19.82,25.41 17.93,27.3 17.93,28.61 18.12,28.8 18.55,28.8 U14.9
ICN
  Top 0.152: R62.2 14.82,11.13 C45.1 14.76,11.66 23.11,11.66 24.13,12.69 24.13,20.34 20.89,23.58 20.89,25.86 19.77,26.98 19.77,27.44 U14.12
ICP
  Top 0.152: R61.2 22.44,14.94 C44.2 22.14,15.27 23.63,16.76 23.63,20.34 20.53,23.43 20.53,25.71 19.34,26.9 U14.11
INN
  Top 0.152: R71.2 14.82,6.05 C10.1 14.76,6.58 23.36,6.58 24.84,8.07 24.84,20.64 21.61,23.87 21.61,26.16 20.84,26.92 U14.14
INP
  Top 0.152: R70.2 22.44,9.86 C2.2 24.49,12.51 24.49,20.49 21.25,23.73 21.25,26.01 20.34,26.91 U14.13
IRQ0_ISO  (via drill 0.35)
  Top 0.152: U1.3 42.33,34.71 R35.1 43.14,34.67 v43.14,33.06 | v27.98,35.06 27.22,34.29 24.68,34.29 U14.31
  Bottom 0.152: v43.14,33.06 43.08,33.12 29.49,33.12 27.98,34.63 v27.98,35.06
IRQ0_OUT  (via drill 0.35)
  Top 0.152: U2.4 42.15,52.07 43.18,53.1 43.18,53.34 | R30.1 43.18,53.34 | J3.8 33.61,52.87 v35.09,52.87 | v40.96,55.22 40.96,54.29 41.91,53.34 43.18,53.34
  Bottom 0.152: v35.09,52.87 36.7,52.87 39.1,55.27 40.91,55.27 v40.96,55.22
IRQ1_ISO  (via drill 0.35)
  Top 0.152: U1.1 40.19,34.71 R34.2 38.95,34.71 36.23,37.43 v36.05,37.43 | v31.75,37.02 30.64,35.92 27.91,35.92 26.64,34.65 24.28,34.65 23.74,34.11 23.57,34.11 23.41,33.95 23.41,33.52 U14.32
  Bottom 0.152: v36.05,37.43 35.64,37.02 v31.75,37.02
IRQ1_OUT
  Top 0.152: U3.4 37.06,51.84 38.1,52.87 38.1,53.34 | J3.9 34.42,54.48 35.56,53.34 38.1,53.34 | R31.1 38.1,53.34
MISO  (via drill 0.35)
  Top 0.152: v22.22,49.58 U8.2 | v20.32,49.78 U10.6
  Bottom 0.152: v20.32,49.78 20.52,49.58 v22.22,49.58
MISO_ISO
  Top 0.152: U14.38 20.32,33.47 20.32,34.12 20.34,34.14 20.34,34.69 20.32,34.71 U10.11
MISO_OUT  (via drill 0.35)
  Top 0.152: J3.3 20.32,53.47 v20.32,53.34 | v22.99,53.73 22.99,52.83 U8.4
  Bottom 0.152: v20.32,53.34 20.71,53.73 20.87,53.73 21.21,53.39 22.22,53.39 22.56,53.73 v22.99,53.73
MOSI
  Top 0.152: J3.6 26.8,53.72 24.83,51.76 24.83,50.48 24.13,49.78 U10.3
MOSI_ISO  (via drill 0.35)
  Top 0.152: v19.68,34.42 19.84,34.26 U14.39 | U10.14 24.13,38.22 v22.3,36.39
  Bottom 0.152: v19.68,34.42 19.68,34.51 21.55,36.39 v22.3,36.39
N$1
  Top 0.152: 35.7,35 29.37,35 27.94,33.57 27.94,33.02 27.65,32.73 U14.30 | C5.1 36.83,34.29 36.12,35 35.7,35 | Y2.3 35.7,35
N$2
  Top 0.152: R21.1 R22.2 14.82,24.03 C11.2
N$3
  Top 0.152: R15.1 R14.2 11.01,20.36 C12.1
N$4
  Top 0.152: U11.5 10.77,35.45 L1.1
N$7
  Top 0.152: R61.1 R57.2 18.45,12.88 C30.2
N$8
  Top 0.152: R62.1 R60.2 11.05,8.93 C43.1
N$10
  Top 0.152: C38.2 84.37,20.2 R9.1
N$11
  Top 0.152: R32.2 37.68,38.52 38.1,38.1 39.37,38.1 40.61,36.86 U1.6
N$12
  Top 0.152: U3.1 37.06,40.45 R32.1
N$13
  Top 0.152: Y2.1 30.91,31.87 C4.2 28.7,33.57 28.3,33.17 28.3,32.87 27.66,32.23 U14.29
N$16  (via drill 0.35)
  Top 0.152: S4.4 S4.1 80.94,24.45 v81.64,25.15 | R25.2 v81.34,12.45
  Bottom 0.152: v81.34,12.45 81.28,12.51 81.28,23.62 81.64,23.98 v81.64,25.15
N$18
  Top 0.152: U13.6 13.83,42.54 D1.A
N$19  (via drill 0.35)
  Top 0.152: D2.C 4.61,38.99 C24.1 6.95,37.85 U11.3 7.43,38.67 v7.43,38.71 | D1.C 12.95,37.47 C25.2 12.83,37.55 C26.2 11.2,36.81 U11.1 10.92,37.08 v10.92,36.99
  Bottom 0.152: v7.43,38.71 9.21,38.71 v10.92,36.99
N$20
  Top 0.152: U13.4 4.2,42.79 D2.A
N$21
  Top 0.152: U12.3 11.68,51.18 U13.1
N$23
  Top 0.152: U13.3 6.6,50.04 8.64,52.07 U12.1
N$24
  Top 0.152: R23.1 R56.2 18.63,19.08 C21.2
N$25
  Top 0.152: R29.2 34.29,49.02 U6.1
N$26
  Top 0.152: U7.6 33.84,52.1 R29.1
N$27
  Top 0.152: R53.1 R41.2 10.65,14.33 C28.1
N$28
  Top 0.152: R9.2 R10.1
N$30
  Top 0.152: R33.2 U1.4
N$31
  Top 0.152: R76.2 60.96,37.25 U5.4
N$33
  Top 0.152: R1.2 R52.1
N$34
  Top 0.152: R65.1 41.54,15.25 R64.2
N$39
  Top 0.152: U2.1 42.15,40.45 R33.1
N$40
  Top 0.152: R58.1 27.56,10.16 JP2-1.1
N$41
  Top 0.152: R59.1 27.3,15.24 R58.2
N$42  (via drill 0.35)
  Top 0.152: S6.4 S6.1 81.73,37.15 v81.79,37.08 | R10.2 v82.55,23.11
  Bottom 0.152: v82.55,23.11 82.8,23.37 82.8,36.07 v81.79,37.08
N$43
  Top 0.152: 33.99,14.27 33.99,18.08 33.02,19.05 R59.2 | 33.99,14.27 33.02,15.24 JP2-1.3 | R44.1 34.73,9.02 33.99,9.75 33.99,14.27
N$44
  Top 0.152: R64.1 45.59,10.29 JP2-2.1
N$46
  Top 0.152: 47.86,14.37 46.99,15.24 JP2-2.3 | 47.86,14.37 47.86,18.05 46.86,19.05 R65.2 | R47.1 50.67,8.89 49.02,8.89 47.86,10.05 47.86,14.37
N$47
  Top 0.152: R63.2 55.41,15.15 R72.1
N$48
  Top 0.152: R70.1 R68.2 18.55,7.7 C46.2
N$50
  Top 0.152: R37.2 75.9,17.45 75.9,14.27 | JP2-4.3 74.93,15.24 75.9,14.27 | R38.1 76.83,9.02 75.9,9.95 75.9,14.27
N$52
  Top 0.152: JP2-4.1 69.47,10.16 R36.1
N$53
  Top 0.152: R36.2 69.34,18.91 R37.1
N$54
  Top 0.152: R52.2 59.69,30.48 59.05,31.11 | JP5.9 59.05,31.11 | JP7.2 60.33,31.11 59.05,31.11
N$56  (1 unrouted)
  Top 0.152: 11.01,4.95 R69.2 R71.1
N$58
  Top 0.152: C39.2 84.37,14.86 R2.1
N$59
  Top 0.152: R2.2 R17.1
N$60  (via drill 0.35)
  Top 0.152: S5.4 S5.1 81.73,30.8 v81.79,30.73 | R17.2 v82.04,17.78
  Bottom 0.152: v82.04,17.78 81.89,17.93 81.89,23.47 82.3,23.88 82.3,30.23 v81.79,30.73
N$61
  Top 0.152: D3.1 73.73,38.1 R12.1
N$62
  Top 0.152: S4.2 75.69,24.45 D6.3 75.06,25.07 75.06,25.12 74.9,25.28 74.85,25.28 74.43,25.7 D6.2 74.43,27.26 74.09,27.59 74.09,28.29 74.58,28.78 76.87,28.78 S4.3
N$63
  Top 0.152: C40.2 84.37,9.53 R24.1
N$64
  Top 0.152: R24.2 R25.1
N$65  (via drill 0.35)
  Top 0.152: D3.4 75.24,38.99 75.24,40.16 74.93,40.46 v74.93,40.64 | v73.66,41.91 72.39,40.64 R11.2
  Bottom 0.152: v74.93,40.64 v73.66,41.91
N$66
  Top 0.152: S5.2 75.69,30.8 75.47,31.02 D4.3 75.06,31.42 75.06,31.47 74.9,31.63 74.85,31.63 74.43,32.05 D4.2 74.43,33.61 74.09,33.94 74.09,34.64 74.58,35.13 76.87,35.13 S5.3
N$67
  Top 0.152: U4.1 62.23,42.06 R76.1
N$68
  Top 0.152: U9.1 57.4,42.27 57.4,40.47 R77.1
N$69
  Top 0.152: R77.2 57.57,38.1 58.42,38.1 59.66,36.86 U5.6
N$71  (via drill 0.35)
  Top 0.152: R40.2 71.12,21.59 68.58,24.13 v68.58,26.42 | v57.15,26.42 57.15,26.16 56.13,25.15 54.86,25.15 JP5.1 JP5.3 JP5.5 JP5.7
  Bottom 0.152: v68.58,26.42 v57.15,26.42
N$72
  Top 0.152: U15.1 52.3,40.45 R82.1
N$73
  Top 0.152: U17.1 47.23,40.45 R83.1
N$74
  Top 0.152: R83.2 46.99,36.52 U16.6
N$76
  Top 0.152: S6.2 76.73,37.4 D3.3 75.06,37.77 75.06,37.82 74.9,37.98 74.85,37.98 74.43,38.4 D3.2 74.43,39.96 74.09,40.29 74.09,40.99 74.58,41.48 76.87,41.48 S6.3
N$78  (via drill 0.35)
  Top 0.152: D4.4 75.43,33.79 v74.93,34.29 | v73.66,35.56 72.39,34.29 R19.2
  Bottom 0.152: v74.93,34.29 v73.66,35.56
N$79
  Top 0.152: R45.2 36.7,21.59 R46.1
N$81  (via drill 0.35)
  Top 0.152: v65.8,6.28 80.88,6.28 82.97,8.37 82.97,10.62 C40.1
  Bottom 0.152: JP2-3.2 61.69,10.7 61.7,10.7 61.7,8.9 63.3,7.3 F3.1 65.09,6.28 v65.8,6.28
N$82  (via drill 0.35)
  Top 0.152: v67.3,25.3 67.3,26.55 R1.1 64.77,30.48 JP7.1
  Bottom 0.152: F4.1 77.3,7.3 75.7,8.9 75.7,10.7 73.7,12.7 JP2-4.2 67.3,19.06 v67.3,25.3
N$83  (via drill 0.35)
  Top 0.152: v39.1,7.4 80.6,7.4 81.1,7.9 v81.1,9.5 | v82.7,20.2 83.27,20.77 C38.1
  Bottom 0.152: JP2-1.2 33.8,10.65 33.8,9 35.5,7.3 F1.1 39,7.3 v39.1,7.4 | v81.1,9.5 81.4,9.8 81.4,11.1 82.1,11.8 82.1,16.41 82.7,17.01 82.7,18.05 v82.7,20.2
N$84
  Top 0.152: R48.2 50.93,21.59 R49.1
N$85
  Top 0.152: R50.1 62.87,9.02 61.83,10.05 61.83,14.37 | 61.83,14.37 60.96,15.24 JP2-3.3 | R72.2 61.83,17.35 61.83,14.37
N$86  (via drill 0.35)
  Top 0.152: JP4.1 JP4.3 22.61,5.08 23.37,5.08 v23.62,4.83 | v45.72,22.86 45.72,22.01 R49.2
  Bottom 0.152: v23.62,4.83 24.89,6.1 24.89,20.32 26.59,22.02 42.43,22.02 43.92,23.52 44.72,23.52 45.38,22.86 v45.72,22.86
N$87  (via drill 0.35)
  Top 0.152: v51.9,6.7 52.14,6.94 80.85,6.94 82.2,8.29 v82.2,9.5 | v82.8,14.7 83.27,15.17 C39.1
  Bottom 0.152: JP2-2.2 45.72,12.68 47.7,10.7 47.7,8.8 49.2,7.3 F2.1 50.88,6.7 v51.9,6.7 | v82.2,9.5 82.5,9.5 82.66,9.66 82.66,14.56 v82.8,14.7
N$90
  Top 0.152: JP2-3.1 59.56,10.29 R63.1
N$96
  Top 0.152: R50.2 R51.1
N$97
  Top 0.152: R75.1 64.64,21.59 R51.2
N$99
  Top 0.152: R82.2 51.65,38.1 49.53,38.1 48.26,36.83 U16.4
N$102
  Top 0.152: R44.2 R45.1
N$107
  Top 0.152: R47.2 R48.1
N$112
  Top 0.152: R39.1 R38.2
N$113
  Top 0.152: R39.2 78.61,21.59 R40.1
N$118
  Top 0.152: D4.1 73.73,31.75 R20.1
N$121
  Top 0.152: D6.1 73.73,25.4 R27.2
N$122  (via drill 0.35)
  Top 0.152: D6.4 75.43,27.44 v74.93,27.94 | v73.66,29.21 72.39,27.94 R26.2
  Bottom 0.152: v74.93,27.94 v73.66,29.21
NEUT
  Bottom 0.152: F4.2 65.33,3.3 X3.8
PGROUND  (via drill 0.35)
  Top 0.152: v79.3,3.91 78.69,3.3 X3.10 | 70.27,29.21 R26.1 R27.1 70.27,24.98 71.63,23.62 81.79,23.62 82.8,24.64 v84.38,24.64 | 70.27,29.21 R20.2 R19.1 R12.2 R11.1 | 70.27,29.21 v68.58,29.21
  Bottom 0.152: v68.58,29.21 68.33,29.21 | v84.38,24.64 84.24,24.49 84.24,9.84 79.3,4.9 v79.3,3.91
  pour Bottom: 68.83,29.72 53.34,29.72 53.34,28.7 68.83,28.7
REF
  Top 0.152: U14.16 21.91,27.44 21.91,27.01 22.37,26.55 22.37,25.89 23.28,24.98 C22.1 24.55,24.98 25.4,24.13 26.12,24.13 C34.2
RESET
  Top 0.152: J3.7 29.34,52.23 U7.1 26.87,52.1 R28.2
RESET_ISO  (via drill 0.35)
  Top 0.152: R13.1 C1.2 | C1.2 11.43,29.21 12.45,30.23 U14.6 | C1.2 11.64,29 12.49,29 v12.7,29.21 | v27.28,33.39 27.58,33.69 27.58,33.72 29.42,35.56 33.02,35.56 33.28,35.83 U6.4
  Bottom 0.152: v12.7,29.21 24.5,29.21 26.67,31.38 26.67,32.97 27.09,33.39 v27.28,33.39
SCLK  (via drill 0.35)
  Top 0.152: v23.5,51.44 23.5,53.3 23.65,53.45 23.65,54 J3.5 | v23.43,49.78 22.86,49.21 U10.4
  Bottom 0.152: v23.5,51.44 23.5,49.85 v23.43,49.78
SCLK_ISO
  Top 0.152: U14.37 20.84,35.42 21.64,36.22 21.64,36.78 21.9,37.05 22.16,37.05 22.86,37.75 U10.13
V_PH_A
  Bottom 0.152: X3.2 32.44,3.3 29.04,6.7 28.12,6.7 F1.2
V_PH_B
  Bottom 0.152: F2.2 41.52,6.23 X3.4
V_PH_C
  Bottom 0.152: X3.6 54.61,6.58 F3.2
VAN  (via drill 0.35)
  Top 0.152: v50.8,25.4 50.08,24.68 C19.1 | R3.2 v50.8,25.4 | v50.8,25.4 JP5.2 | v25.4,25.4 25.16,25.4 24.75,25.81 24.13,25.81 23.34,26.6 U14.19
  Bottom 0.152: v50.8,25.4 49,27.2 27.2,27.2 v25.4,25.4
VAP
  Top 0.152: R46.2 31.73,21.77 | 31.73,21.77 28.46,21.77 R6.2 | 31.73,21.77 31.99,21.77 31.03,22.73 C9.1 30.93,22.86 30.35,23.44 28.88,23.44 27.25,25.07 27.25,25.1 26.29,26.06 25.29,26.06 U14.20
VBN  (via drill 0.35)
  Top 0.152: JP5.4 v50.8,27.94 | v50.8,27.94 R4.2 | v50.8,27.94 50.08,27.22 C20.1 | v25.76,27.03 U14.21
  Bottom 0.152: v50.8,27.94 50.42,27.56 26.29,27.56 v25.76,27.03
VBP  (via drill 0.35)
  Top 0.152: v44.45,22.86 43.18,21.59 R7.2 | C16.1 v44.45,22.86 | v44.45,22.86 42.36,22.86 41.42,23.8 29.05,23.8 26.67,26.18 26.67,27.3 25.25,28.73 U14.22 | v23.62,1.52 23.37,1.27 20.32,1.27 19.81,1.78 JP4.2
  Bottom 0.152: v23.62,1.52 25.35,3.25 25.35,20.27 26.67,21.59 43.18,21.59 v44.45,22.86
VCC  (via drill 0.35)
  Top 0.152: U11.4 9.14,34.56 | 9.14,34.56 9.42,34.29 v10.16,34.29 | v10.16,34.29 10.71,34.29 L1.2 | R13.2 9.74,27.09 v10.16,26.67 11.01,26.67 C1.1 | U14.1 18.07,33.28 v15.5,33.28 | U14.27 27.42,31.23 29.44,29.21 C37.2 30.51,28.63 31.45,28.63 31.61,28.79 C33.1 33.86,28.79 v34.29,29.22 | C27.1 9.14,34.56 | C41.1 11.43,33.02 v10.16,34.29 | U16.5 47.61,37.45 48.26,38.1 C49.2 49.47,38.82 v49.53,38.76 | C6.2 39.92,38.82 v40.64,38.1 41.26,37.48 U1.5 | C42.2 59.14,38.1 v59.69,38.1 60.31,37.48 U5.5 | C7.2 19.05,36.11 v19.05,36.83 U10.10 | v26.67,36.83 U10.16 27.08,38.51 v27.94,39.37 | v41.7,30.27 41.78,30.27 44.79,33.27 v45.22,33.27
  Bottom 0.152: v10.16,26.67 v10.16,34.29 11.43,35.56 13.21,35.56 v15.5,33.28 15.5,35.82 16.51,36.83 v19.05,36.83 20.32,38.1 23.2,38.1 25.13,36.17 26.01,36.17 v26.67,36.83 | 43.18,38.1 v40.64,38.1 39.37,38.1 38.76,37.49 38.76,36.56 38.37,36.17 37.83,36.17 37.44,36.56 37.44,37.71 35.78,39.37 v27.94,39.37 | 49.53,38.1 50.14,37.49 50.14,36.56 50.53,36.17 51.07,36.17 51.46,36.56 51.46,36.83 52.73,38.1 v59.69,38.1 | v34.29,29.22 34.54,29.47 40.9,29.47 v41.7,30.27 | v45.22,33.27 45.22,36.06 43.18,38.1 | v49.53,38.76 49.53,38.1 | 43.18,38.1 49.53,38.1
VCN  (via drill 0.35)
  Top 0.152: v50.8,30.48 50.08,29.76 C48.1 | v50.8,30.48 R5.2 | v50.8,30.48 JP5.6 | v26.57,28.42 25.76,29.23 U14.23
  Bottom 0.152: v50.8,30.48 50.8,28.87 50.1,28.17 26.82,28.17 v26.57,28.42
VCP
  Top 0.152: C17.1 56.43,21.89 R8.2 | U14.24 24.63,29.66 26.26,29.66 27.23,28.7 27.23,26.14 29.21,24.16 41.88,24.16 42.52,23.52 46.67,23.52 46.72,23.47 46.99,23.47 47.33,23.14 52.68,23.14 53.07,23.52 56.02,23.52 56.43,23.11 C17.1 | R75.2 59.69,21.59 58.42,22.86 C17.1
VDD  (via drill 0.35)
  Top 0.152: C32.2 4.61,46.99 v5.08,46.99 3.81,45.72 C29.1 | U12.2 10.16,51.75 v10.16,50.8 10.16,50.55 U13.2 | J3.1 13.97,54.48 v13.97,52.07 | R80.2 52.92,55.46 v52.07,54.61 | v57.15,54.61 58,55.46 R74.2 | v62.23,54.61 63.08,55.46 R73.2 | v46.99,54.61 47.84,55.46 R81.1 | v41.91,54.61 42.76,55.46 R30.2 | v36.83,54.61 37.68,55.46 R31.2 | C3.1 v33.02,49.53 33.02,50.24 31.98,51.28 31.58,51.28 U7.5 | U10.7 19.05,50.08 C8.1 19.05,51.52 v19.05,52.07 19.68,52.7 20.03,52.7 20.05,52.68 20.59,52.68 20.61,52.7 U8.5 | R28.1 U10.1 v28.6,48.26
  Bottom 0.152: v5.08,46.99 8.89,50.8 v10.16,50.8 11.43,52.07 v13.97,52.07 15.58,52.07 16.24,52.73 18.39,52.73 v19.05,52.07 23.2,52.07 23.86,52.73 28.21,52.73 29.87,51.07 | 29.87,51.07 29.87,49.53 v28.6,48.26 | 29.87,51.07 31.41,49.53 v33.02,49.53 33.2,49.71 33.2,55.12 33.91,55.83 34.92,55.83 36.14,54.61 v36.83,54.61 38.1,55.88 43.18,55.88 | v62.23,54.61 60.96,55.88 58.42,55.88 | 58.42,55.88 v57.15,54.61 | 58.42,55.88 53.34,55.88 | 53.34,55.88 v52.07,54.61 | 53.34,55.88 48.26,55.88 | 48.26,55.88 v46.99,54.61 | 48.26,55.88 43.18,55.88 | v41.91,54.61 43.18,55.88
(copper drawn outside any net)
  shapes: Top area x2

## Text on the board
tPlace: Data Interface | 3.3V | GND | MISO | CS | SCLK | MOSI | RESET | IRQ0 | IRQ1 | GND | J3 | CF4 | CF3/ZX | CF2 | CF1 | . | . | . | . | . | Isolated 3-Phase AC Power Meter | 3-Phase Current / X1-1: PhA (+) / X1-3: PhB (+) / X1-5: PhC (+) / X1-7: Neut (+) | X1-2: PhA (-) / X1-4: PhB (-) / X1-6: PhC (-) / X1-8: Neut (-) | 3-Phase Voltage / X3-2: PhA / X3-4: PhB / X3-6: PhC / X3-8: Neut / X3-10: PGND | 280V Option: / To ALL JP2-X, / Pins 2 and 3 / / 480V Option: / To ALL JP2-X, / Pins 1 and 2 / / Blondel Config. / JP4-1: Blondel / !JP4-2: !Non- / Blondel / / Neut. Refer. / JP5-1: PhA / JP5-2: PhB / JP5-3: PhC / / JP5-4: GND / JP5-5: GND* / JP7: GND** / / Several Neutral / GND references / for performace / and safety / reasons. / Read Datasheet / for clarification | PhA LED | . | . | . | . | . | . | . | . | . | . | . | . | . | CT Input | PhB LED | 1 | . | . | . | . | A | . | 2 | . | . | PhC LED | 3 | B | WARNING: / Jumpers may be live! / Change jumpers ONLY / with power disconnected / from all sources to board | . | . | 4 | R39 | 5 | C | 6 | 7 | R38 | N | 8 | PhA | 2 | 4 | PhB | 6 | PhC | 8 | Neut | PGND | 10 | Voltage Input
bPlace: Isolated 3-Phase AC Power Meter / SPI Interface / (Analog Devices ADE9078 Chipset) / / Created by / P. Nguyen J. Wan J.Baez / E. Granizo D. Brady / / Calit2/CalPlug, / UC Irvine, 2019 | . | U3 | U2 | U17 | U15 | U9 | U4 | U13 | . | U10 | U6 | . | . | . | . | . | . | . | 4-Wire Delta: / PhA: X3-2 / PhB: X3-4, JP4-1 / PhC: X3-6 / Neut: X3-8, JP7, JP5-5 / PGND: X3-10 | 1P | 3-Wire Delta, Isolated GND (1) / PhA: X3-2 / PhB: X3-4, X3-8, JP4-1, J2-4 JP5* / *Series Impedance: / VAN: JP5-1 / VBN: JP5-2 / VCN: JP5-3 / PhC: X3-6 / Neut: None / PGND: X3-10 | 4-Wire Wye, Neut to GND: / PhA: X3-2 / PhB: X3-4, JP4-1 / PhC: X3-6 / Neut: X3-8, JP7, JP5-5 / PGND: X3-10 | 3-Wire Delta, PhB to GND: / / PhA: X3-2 / / / PhB: X3-4, X3-8, JP4-1, JP7, JP5-5 / PhC: X3-6 / Neut: None / PGND: X3-10 | 1N | 2P | 4-Wire Wye, Non-Blondel: / PhA: X3-2 / PhB: X3-4, JP4-2 / PhC: X3-6 / Neut: X3-8, JP7, JP5-5 / PGND: X3-10 | 2N | 4-Wire Wye, Isolated GND / PhA: X3-2 / PhB: X3-4, JP4-1 / PhC: X3-6 / Neut: X3-8, JP7, JP5* / *Series Impedance: / VAN: JP5-1 / VBN: JP5-2 / VCN: JP5-3 / PGND: X3-10 | 3P | 4-Wire Delta, Non-Blondel: / PhA: X3-2 / PhB: X3-4, JP4-2 / PhC: X3-6 / Neut: X3-8, JP7, JP5-5 / PGND: X3-10 | 3N | 3-Wire Delta, Isolated GND (2) / PhA: X3-2 / PhB: X3-4, X3-8, JP4-1, JP7, JP5-5 / PhC: X3-6 / Neut: None / PGND: X3-10 | NN | NP